# EAGLE board GameboyCartridgeKS_Modest (EAGLE 6.3)
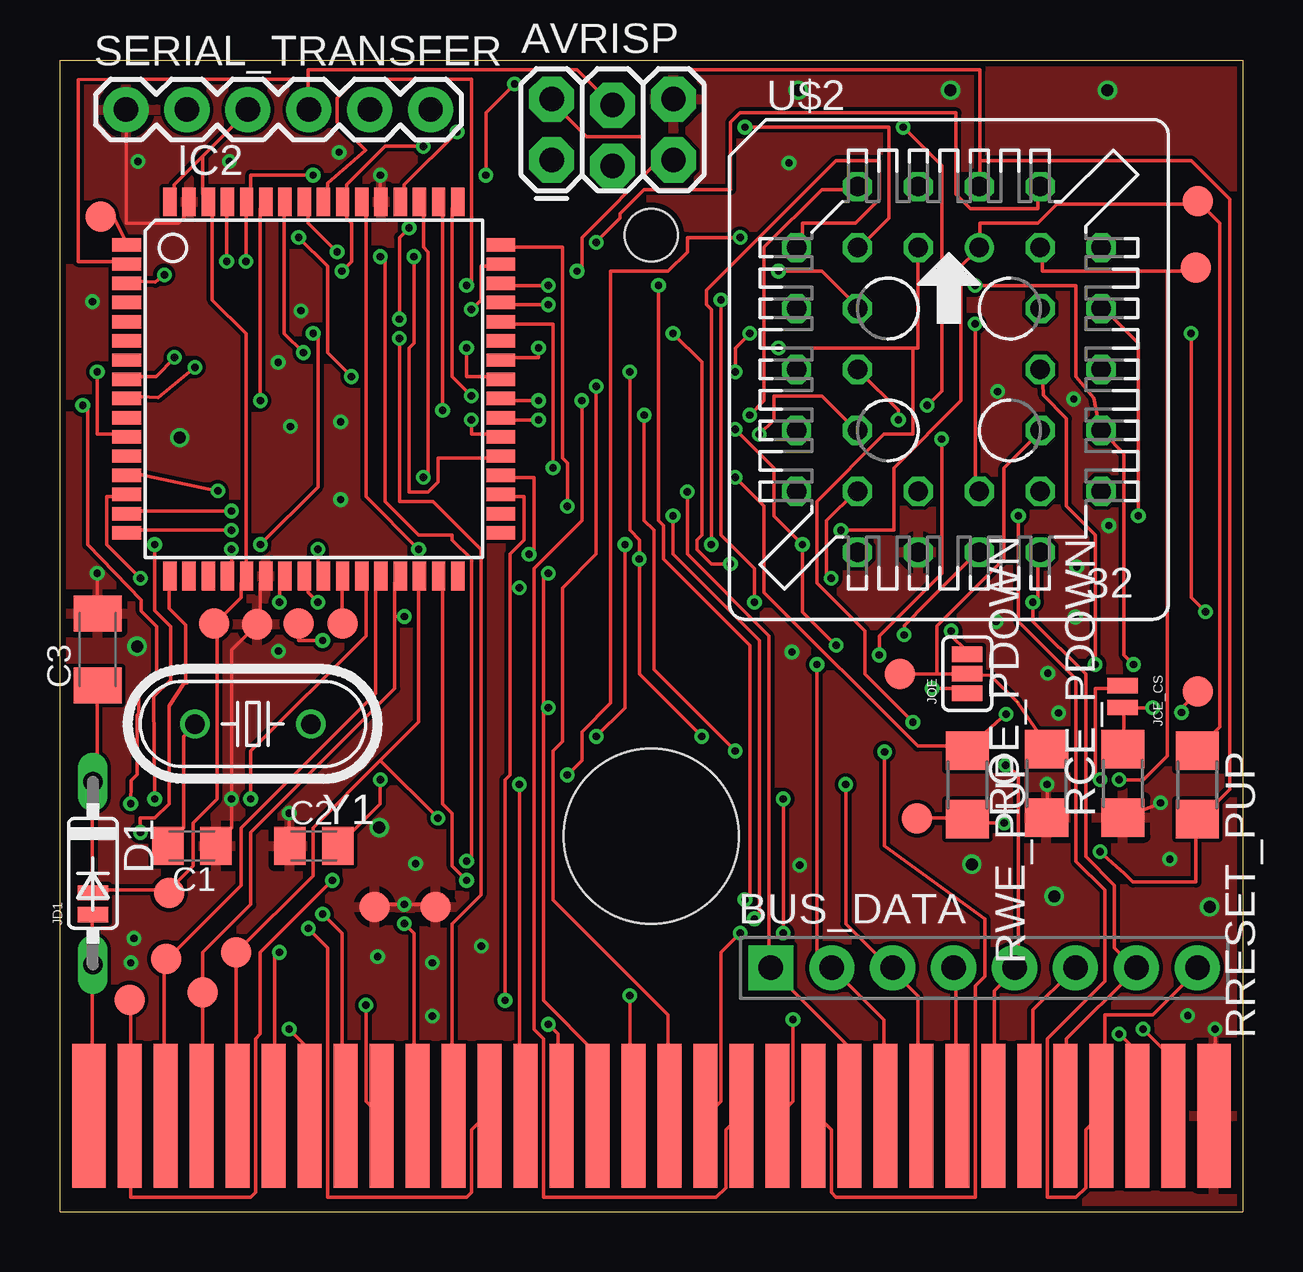
[diagram p0: board, top side]
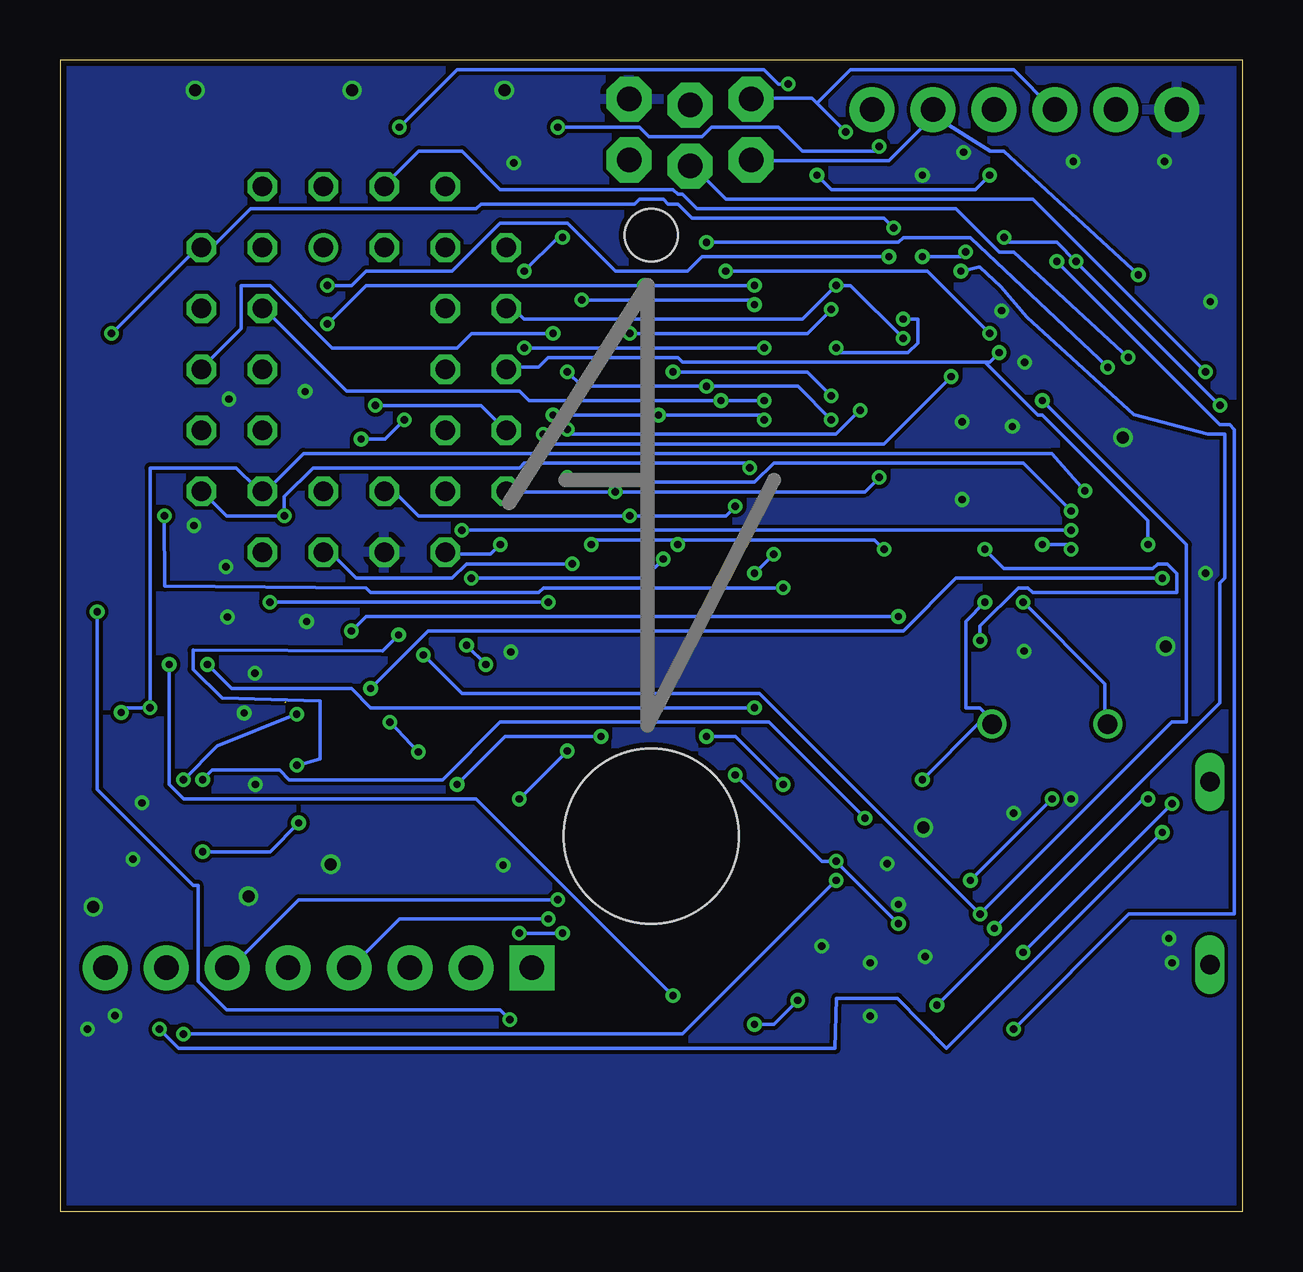
[diagram p1: board, bottom side, seen from below]

Size 49.3 x 48 mm. Coordinates in mm from the lower left corner, seen from the top.
Outline: 49.3,48 49.3,0 0,0 0,48 49.3,48
Copper layers (1*2*15*16): Top 0.035mm / dielectric 0.2mm / layer 2 0.0175mm / dielectric 1.1mm / layer 15 0.0175mm / dielectric 0.2mm / Bottom 0.035mm
Design rules "SeeedStudio_DRU_no_angle_20130527": minimum track width 6mil, minimum drill 12mil, track to track 6mil, track to pad 6mil, pad to pad 6mil, via to via 6mil, smd to smd 0mil, copper to edge 10mil, drill to drill 10mil, minimum pad ring 6mil, minimum via ring 6mil, stop-mask expansion 2mil, vias tented up to drill 25mil, thermal gap 10mil
Holes 7.3 mm at 24.65,15.65
Holes 2.2 mm at 24.65,40.7

## Footprints (pad centres in the part's own frame; a part is rotated, then mirrored left to right if it is on the bottom)
2X3_LOCK = drill 1.016 pad 1.88 octagon: 1 0,0; 2 0,2.54; 3 2.54,-0.254; 4 2.54,2.286; 5 5.08,0; 6 5.08,2.54
1X08_PIN1_NO_SILK = drill 1.016 pad 1.88 square: 1 0,0 | drill 1.016 pad 1.88: 2 2.54,0; 3 5.08,0; 4 7.62,0; 5 10.16,0; 6 12.7,0; 7 15.24,0; 8 17.78,0
C0805K = smd 1.3 x 1.6: 1 -1,0; 2 1,0
C1206K = smd 1.5 x 2: 1 -1.5,0; 2 1.5,0
DO35-7 = drill 0.813 long: A 3.81,0; C -3.81,0
TQFP64 = smd 1.194 x 0.559: 1 -7.8,6; 2 -7.8,5.2; 3 -7.8,4.4; 4 -7.8,3.6; 5 -7.8,2.8; 6 -7.8,2; 7 -7.8,1.2; 8 -7.8,0.4; 9 -7.8,-0.4; 10 -7.8,-1.2; 11 -7.8,-2; 12 -7.8,-2.8; 13 -7.8,-3.6; 14 -7.8,-4.4; 15 -7.8,-5.2; 16 -7.8,-6; 33 7.8,-6; 34 7.8,-5.2; 35 7.8,-4.4; 36 7.8,-3.6; 37 7.8,-2.8; 38 7.8,-2; 39 7.8,-1.2; 40 7.8,-0.4; 41 7.8,0.4; 42 7.8,1.2; 43 7.8,2; 44 7.8,2.8; 45 7.8,3.6; 46 7.8,4.4; 47 7.8,5.2; 48 7.8,6 | smd 0.559 x 1.194: 17 -6,-7.8; 18 -5.2,-7.8; 19 -4.4,-7.8; 20 -3.6,-7.8; 21 -2.8,-7.8; 22 -2,-7.8; 23 -1.2,-7.8; 24 -0.4,-7.8; 25 0.4,-7.8; 26 1.2,-7.8; 27 2,-7.8; 28 2.8,-7.8; 29 3.6,-7.8; 30 4.4,-7.8; 31 5.2,-7.8; 32 6,-7.8; 49 6,7.8; 50 5.2,7.8; 51 4.4,7.8; 52 3.6,7.8; 53 2.8,7.8; 54 2,7.8; 55 1.2,7.8; 56 0.4,7.8; 57 -0.4,7.8; 58 -1.2,7.8; 59 -2,7.8; 60 -2.8,7.8; 61 -3.6,7.8; 62 -4.4,7.8; 63 -5.2,7.8; 64 -6,7.8
PAD-JUMPER-2-NO_NO_SILK = smd 0.635 x 1.27: 1 -0.45,0; 2 0.45,0
PAD-JUMPER-3-NO_YES_SILK = smd 0.635 x 1.27: 1 -0.813,0; 2 0,0; 3 0.813,0
PAD.03X.05 = smd 1.27 x 1.27: P$1 0,0
R1206 = smd 1.6 x 1.803: 1 -1.422,0; 2 1.422,0
1X06 = drill 1.016 pad 1.88: 1 0,0; 2 2.54,0; 3 5.08,0; 4 7.62,0; 5 10.16,0; 6 12.7,0
CONNECTOR = smd 1.4 x 6: 1 0.7,-3; 32 47.6,-3 | smd 1 x 6: 2 2.4,-3; 3 3.9,-3; 4 5.4,-3; 5 6.9,-3; 6 8.4,-3; 7 9.9,-3; 8 11.4,-3; 9 12.9,-3; 10 14.4,-3; 11 15.9,-3; 12 17.4,-3; 13 18.9,-3; 14 20.4,-3; 15 21.9,-3; 16 23.4,-3; 17 24.9,-3; 18 26.4,-3; 19 27.9,-3; 20 29.4,-3; 21 30.9,-3; 22 32.4,-3; 23 33.9,-3; 24 35.4,-3; 25 36.9,-3; 26 38.4,-3; 27 39.9,-3; 28 41.4,-3; 29 42.9,-3; 30 44.4,-3; 31 45.9,-3
PLCC-S32 = drill 0.813: 1 1.27,5.08 | drill 0.813 octagon: 2 -1.27,7.62; 3 -1.27,5.08; 4 -3.81,7.62; 5 -6.35,5.08; 6 -3.81,5.08; 7 -6.35,2.54; 8 -3.81,2.54; 9 -6.35,0; 10 -3.81,0; 11 -6.35,-2.54; 12 -3.81,-2.54; 13 -6.35,-5.08; 14 -3.81,-7.62; 15 -3.81,-5.08; 16 -1.27,-7.62; 17 -1.27,-5.08; 18 1.27,-7.62; 19 1.27,-5.08; 20 3.81,-7.62; 21 6.35,-5.08; 22 3.81,-5.08; 23 6.35,-2.54; 24 3.81,-2.54; 25 6.35,0; 26 3.81,0; 27 6.35,2.54; 28 3.81,2.54; 29 6.35,5.08; 30 3.81,7.62; 31 3.81,5.08; 32 1.27,7.62
HC49U-V = drill 0.813: 1 -2.413,0; 2 2.413,0

## Placement (x,y rotation side)
AVRISP  AVR_SPI_PRG_62X3_LOCK  [2X3_LOCK]  20.49,43.83 0 top
BUS_DATA  [1X08_PIN1_NO_SILK]  29.63,10.16 0 top
C1  22pF  [C0805K]  5.5,15.24 180 top
C2  22pF  [C0805K]  10.58,15.24 0 top
C3  10uF  [C1206K]  1.56,23.43 90 top
D1  Germ.  [DO35-7]  1.37,14.1 270 top
IC2  MEGA64-A  [TQFP64]  10.58,34.29 0 top
JCE_CS  [PAD-JUMPER-2-NO_NO_SILK]  44.3,21.46 270 top
JD1  [PAD-JUMPER-2-NO_NO_SILK]  1.37,12.83 90 top
JOE  [PAD-JUMPER-3-NO_YES_SILK]  37.82,22.42 90 top
PEN  TEST-POINT3X5  [PAD.03X.05]  1.69,41.47 0 top
PEN1  TEST-POINT3X5  [PAD.03X.05]  13.12,12.7 0 top
PEN2  TEST-POINT3X5  [PAD.03X.05]  15.66,12.7 0 top
PEN3  TEST-POINT3X5  [PAD.03X.05]  4.55,13.27 0 top
PEN4  TEST-POINT3X5  [PAD.03X.05]  35.73,16.38 0 top
RCE_PDOWN  [R1206]  44.3,17.84 90 top
ROE_PDOWN  [R1206]  41.12,17.84 90 top
RRESET_PUP  [R1206]  47.41,17.78 270 top
RWE_PUP  [R1206]  37.82,17.78 270 top
SCL  [PAD.03X.05]  9.95,24.51 0 top
SCL1  [PAD.03X.05]  2.9,8.83 0 top
SCL2  [PAD.03X.05]  4.42,10.54 0 top
SCL3  [PAD.03X.05]  5.94,9.14 0 top
SCL4  [PAD.03X.05]  7.34,10.79 0 top
SDA  [PAD.03X.05]  11.79,24.51 0 top
SERIAL_TRANSFER  [1X06]  2.75,45.93 0 top
TP1  [PAD.03X.05]  47.43,21.67 0 top
TP2  [PAD.03X.05]  35,22.41 0 top
TP3  [PAD.03X.05]  47.34,39.34 0 top
TP4  [PAD.03X.05]  47.42,42.11 0 top
TP5  [PAD.03X.05]  6.42,24.5 0 top
TP6  [PAD.03X.05]  8.21,24.48 0 top
U$1  CONNECTOR  [CONNECTOR]  0.5,7 0 top
U$2  EN29F002T  [PLCC-S32]  37.05,35.1 0 top
U$3  [GAMEBOY_LOGO]  20.3,22.1 0 top
Y1  16MHz max  [HC49U-V]  8.04,20.32 180 top

## Library data of the parts
AVRISP BUS_DATA = SparkFun-Connectors
C1-C3 RCE_PDOWN ROE_PDOWN RRESET_PUP RWE_PUP = resistor
D1 = diode
IC2 = atmel; MPN: ATMEGA64-16AU; OC_FARNELL: 9171355; OC_NEWARK: 01M6899
JCE_CS JD1 JOE PEN PEN1-PEN4 SCL SCL1-SCL4 SDA TP1-TP6 = SparkFun-Passives
SERIAL_TRANSFER = SparkFun-Connectors; PROD_ID: CONN-08437
U$1 = gameboy
U$2 = kalshagar
U$3 = kalshagar-images
Y1 = SparkFun-FreqCtrl

## Nets
22: BUS_DATA.1 IC2.51 U$1.22 U$2.13
23: BUS_DATA.2 IC2.50 U$1.23 U$2.14
24: BUS_DATA.3 IC2.49 U$1.24 U$2.15
25: BUS_DATA.4 IC2.48 U$1.25 U$2.17
26: BUS_DATA.5 IC2.47 U$1.26 U$2.18
27: BUS_DATA.6 IC2.46 U$1.27 U$2.19
28: BUS_DATA.7 IC2.45 U$1.28 U$2.20
29: BUS_DATA.8 IC2.44 U$1.29 U$2.21
!CE: IC2.13 JCE_CS.2 RCE_PDOWN.2 TP1.P$1 U$2.22
!GB_CS: IC2.30 JCE_CS.1 SCL4.P$1 U$1.5
!GB_RD: IC2.29 JOE.3 SCL3.P$1 U$1.4
!GB_RESET: IC2.31 U$1.30
!GB_WR: IC2.28 SCL2.P$1 U$1.3
!OE: JOE.2 ROE_PDOWN.2 TP2.P$1 U$2.24
!RESET: IC2.16 RRESET_PUP.1 TP4.P$1 U$2.1
!WE: IC2.15 RWE_PUP.1 TP3.P$1 U$2.31
ADDRESS0: IC2.61 U$1.6 U$2.12
ADDRESS1: IC2.60 U$1.7 U$2.11
ADDRESS2: IC2.59 U$1.8 U$2.10
ADDRESS3: IC2.58 U$1.9 U$2.9
ADDRESS4: IC2.57 U$1.10 U$2.8
ADDRESS5: IC2.56 U$1.11 U$2.7
ADDRESS6: IC2.55 U$1.12 U$2.6
ADDRESS7: IC2.54 U$1.13 U$2.5
ADDRESS8: IC2.35 U$1.14 U$2.27
ADDRESS9: IC2.36 U$1.15 U$2.26
ADDRESS10: IC2.37 U$1.16 U$2.23
ADDRESS11: IC2.38 U$1.17 U$2.25
ADDRESS12: IC2.39 U$1.18 U$2.4
ADDRESS13: IC2.40 U$1.19 U$2.28
ADDRESS14: IC2.41 U$1.20 U$2.29
ADDRESS15: IC2.42 U$1.21 U$2.3
ADDRESS16: IC2.8 U$2.2
ADDRESS17: IC2.9 U$2.30
CTS: SERIAL_TRANSFER.2
DTR: SERIAL_TRANSFER.6
GB_CLOCK: IC2.27 SCL1.P$1 U$1.2
GB_MIC_IN: IC2.17 U$1.31
GND: AVRISP.6 C1.1 C2.1 C3.2 IC2.22 IC2.53 IC2.63 PEN1.P$1 PEN2.P$1 RCE_PDOWN.1 ROE_PDOWN.1 SERIAL_TRANSFER.1 TP6.P$1 U$1.32 U$2.16
MISO_TX: AVRISP.1 IC2.3 SERIAL_TRANSFER.5
MOSI_RX: AVRISP.4 IC2.2 SERIAL_TRANSFER.4
N$2: C1.2 IC2.23 Y1.2
N$3: AVRISP.5 IC2.20
N$4: C2.2 IC2.24 Y1.1
N$7: IC2.14 JOE.1
PEN: IC2.1 PEN.P$1
SCK: AVRISP.3 IC2.11
SCL: IC2.25 SCL.P$1
SDA: IC2.26 SDA.P$1
VCC: AVRISP.2 C3.1 D1.C IC2.21 IC2.52 IC2.62 IC2.64 JD1.2 PEN3.P$1 PEN4.P$1 RRESET_PUP.2 RWE_PUP.2 SERIAL_TRANSFER.3 TP5.P$1 U$2.32
VDD: D1.A JD1.1 U$1.1

## Tracks (layer width: path | path; a pad name or v marks a point on that pad's centre or on a via)
22  (via drill 0.3)
  Top 0.152: 32.85,4 U$1.22 32.75,4 32.75,7 29.75,10 BUS_DATA.1 29.55,10.2 29.55,24 26.15,27.4 v26.15,30 | v15.15,30.6 15.35,30.8 15.35,40 15.15,40.2 15.15,42 IC2.51
  Bottom 0.152: v15.15,30.6 15.75,30 v26.15,30 30.55,30 U$2.13
23  (via drill 0.3)
  Top 0.152: U$1.23 34.35,4 34.35,8 32.35,10 BUS_DATA.2 32.15,10.2 31.55,10.8 v31.55,22.8 | v15.95,33.4 15.95,42 IC2.50 | v28.15,32.6 29.75,31 29.75,29 v30.95,27.8 30.95,25 v32.35,23.6
  Bottom 0.152: v15.95,33.4 16.95,32.4 27.95,32.4 v28.15,32.6 | v30.95,27.8 31.35,27.4 33.15,27.4 U$2.14 | v32.35,23.6 v31.55,22.8
24  (via drill 0.3)
  Top 0.152: U$1.24 35.75,4 35.75,9 34.75,10 BUS_DATA.3 34.55,10.2 32.75,12 v32.75,17.8 | v17.15,34 16.35,34.8 16.35,41.8 16.55,42 IC2.49 | v23.75,35 23.75,28.4 24.15,28 v24.15,27.2 24.15,22.4 v26.75,19.8 | v32.15,26.4 31.95,26.6 31.95,28.8 33.15,30 U$2.15
  Bottom 0.152: v17.15,34 18.15,35 v23.75,35 | v24.15,27.2 24.95,26.4 v32.15,26.4 | v32.75,17.8 30.75,19.8 v26.75,19.8
25  (via drill 0.3)
  Top 0.152: BUS_DATA.4 37.35,10 37.35,4 U$1.25 | v21.15,29.4 21.15,31.2 20.95,31.4 20.95,40.2 18.55,40.2 IC2.48 | v28.95,12.2 29.15,12.4 29.15,23.8 25.55,27.4 v25.55,29
  Bottom 0.152: v21.15,29.4 21.55,29 v25.55,29 34.35,29 35.35,30 35.75,30 U$2.17 | v28.95,12.2 35.15,12.2 37.15,10.2 BUS_DATA.4
26  (via drill 0.3)
  Top 0.152: U$1.26 38.95,4 38.95,9.2 39.75,10 BUS_DATA.5 39.95,10.2 39.95,18.2 v39.42,18.6 | v17.15,37.6 17.55,38 17.55,39.4 18.35,39.4 IC2.47 | v25.55,36.6 26.75,35.4 26.75,28.2 26.55,28 26.55,27.6 27.15,27 v27.95,27 | v35.19,24.04 35.2,24.43 36.15,25.4 38.15,27.4 U$2.18
  Bottom 0.152: v17.15,37.6 18.15,36.6 v25.55,36.6 | v27.95,27 32.35,27 32.95,26.4 36.95,26.4 37.95,27.4 38.15,27.4 U$2.18 | v39.42,18.6 38.45,18.87 38.45,21.27 42.55,21.4 43.75,22.6 43.75,23.4 35.85,23.37 v35.19,24.04
27  (via drill 0.3)
  Top 0.152: BUS_DATA.6 42.15,10 40.55,8.4 40.55,4 U$1.27 | v20.35,38.6 18.55,38.6 IC2.46 | v38.15,37 38.15,30.2 U$2.19 | v28.55,13 28.75,13.2 28.75,23.6 25.15,27.2 25.15,28.6 24.95,28.8 v24.95,38.6
  Bottom 0.152: v20.35,38.6 v24.95,38.6 36.55,38.6 v38.15,37 | v28.55,13 39.35,13 42.15,10.2 BUS_DATA.6
28  (via drill 0.3)
  Top 0.152: U$1.28 41.95,4 41.95,7.2 44.75,10 BUS_DATA.7 44.75,10.2 43.95,11 43.95,13.6 42.75,14.8 42.75,22.4 40.55,24.6 v40.55,25.4 40.75,25.6 40.75,27.4 U$2.20 | v20.35,37.8 18.55,37.8 IC2.45 | v27.55,38 27.55,28.2 28.95,26.8 v28.95,25.4
  Bottom 0.152: v20.35,37.8 20.55,38 v27.55,38 | v40.55,25.4 v28.95,25.4
29  (via drill 0.3)
  Top 0.152: BUS_DATA.8 47.35,10 45.55,8.2 43.55,8.2 43.55,4 U$1.29 43.35,4 42.75,3.4 42.75,1 42.35,0.6 41.15,0.6 41.15,7.2 43.55,9.6 43.55,13.4 42.35,14.6 42.35,22.2 39.95,24.6 v39.95,29 | v20.55,31 20.55,37 18.55,37 IC2.44
  Bottom 0.152: v20.55,31 20.75,31.2 29.95,31.2 30.15,31 38.75,31 39.95,29.8 v39.95,29 42.35,29 43.35,30 U$2.21
!CE  (via drill 0.3)
  Top 0.152: 44.35,21 44.35,19.4 RCE_PDOWN.2 | v46.75,20.8 46.75,21 47.35,21.6 TP1.P$1 | 44.35,21 v45.55,21 | 44.35,21 JCE_CS.2 | v6.58,30.04 2.95,30.8 IC2.13
  Bottom 0.152: v46.75,20.8 46.55,21 v45.55,21 45.55,31 41.95,31 41.15,30.2 40.95,30.2 U$2.22 40.75,30.2 40.55,30.2 39.15,31.6 7.95,31.6 v6.58,30.04
!GB_CS  (via drill 0.3)
  Top 0.152: 13.35,18.8 10.55,16 10.55,14 SCL4.P$1 7.35,10.6 7.35,4 U$1.5 | 13.35,18.8 14.95,20.4 14.95,26.4 IC2.30 | v43.35,18 43.15,18.2 43.15,21.8 44.15,21.8 JCE_CS.1 | 13.35,18.8 v15.75,16.4
  Bottom 0.152: v43.35,18 42.95,18.4 40.15,18.4 39.75,18 33.35,18 30.95,20.4 19.75,20.4 v15.75,16.4
!GB_RD  (via drill 0.3)
  Top 0.152: 13.95,24.8 13.95,21.8 7.95,15.8 7.95,12.8 5.95,10.8 5.95,9.2 SCL3.P$1 5.95,9 5.95,4 U$1.4 | 13.95,24.8 13.95,26.2 14.15,26.4 IC2.29 | v37.15,24.2 37.15,24 37.75,23.4 JOE.3 | 13.95,24.8 v14.35,24.8
  Bottom 0.152: v37.15,24.2 36.55,24.8 v14.35,24.8
!GB_RESET  (via drill 0.3)
  Top 0.152: v16.95,13.8 16.35,14.4 16.35,16.6 15.95,17 15.95,26.4 IC2.31 | v44.15,7.4 44.75,6.8 44.75,4 U$1.30
  Bottom 0.152: v16.95,13.8 23.35,7.4 v44.15,7.4
!GB_WR
  Top 0.152: IC2.28 13.35,26.4 13.15,26.2 13.15,21.6 7.55,16 7.55,13.6 4.55,10.6 SCL2.P$1 4.35,10.4 4.35,4 U$1.3
!OE  (1 unrouted)
  Top 0.152: 36.55,22.4 37.75,22.4 JOE.2 | 36.55,22.4 35.15,22.4 TP2.P$1 | 39.88,21.25 41.15,19.4 ROE_PDOWN.2 | 37.95,22.4 JOE.2 | 36.55,22.4 36.55,24.4 39.35,27.2 39.35,31 40.75,32.4 U$2.24 | JOE.2 38.77,22.35 39.92,21.21
!RESET  (via drill 0.3)
  Top 0.152: v7.15,28.4 2.95,28.4 IC2.16 | v32.55,28.4 34.75,28.4 34.75,31 37.55,33.8 37.55,39.4 38.15,40 U$2.1 38.35,40.2 38.35,41.2 40.75,41.2 41.55,42 47.35,42 TP4.P$1 47.55,42 48.35,41.2 48.35,20.2 47.55,19.4 RRESET_PUP.1
  Bottom 0.152: v32.55,28.4 v7.15,28.4
!WE  (via drill 0.3)
  Top 0.152: 46.15,39.2 40.95,39.2 40.95,40 U$2.31 | 46.15,39.2 47.15,39.2 TP3.P$1 | v7.15,29.2 2.95,29.2 IC2.15 | v28.15,30.6 29.35,29.4 29.35,25.8 35.75,19.4 37.75,19.4 RWE_PUP.1 37.95,19.4 v39.43,20.73 | 46.15,39.2 46.15,19 45.15,18 v44.15,18
  Bottom 0.152: v7.15,29.2 9.15,31.2 19.55,31.2 20.35,30.4 25.75,30.4 25.95,30.6 v28.15,30.6 | v44.15,18 42.75,19.4 v39.43,20.73
ADDRESS0  (via drill 0.3)
  Top 0.152: v6.95,39.6 6.95,42 IC2.61 | v0.95,33.6 1.15,33.4 1.15,27.8 3.4,25.49 3.4,25.03 4.04,24.38 4.04,22.42 3.28,21.65 3.28,20.77 3.21,20.7 3.21,18.22 2.96,17.97 2.96,17.91 v2.95,17 | v9.15,10.8 8.95,10.6 8.95,4 U$1.6 | v29.15,32.4 29.75,33 29.75,34 31.75,34 33.15,32.6 U$2.12 | v12.15,34.8 11.15,35.8 11.15,39.4 v9.95,40.6
  Bottom 0.152: v0.95,33.6 v6.95,39.6 7.75,40.4 9.75,40.4 v9.95,40.6 | v9.15,10.8 v2.95,17 | v29.15,32.4 28.75,32 14.95,32 v12.15,34.8
ADDRESS1  (via drill 0.3)
  Top 0.152: v7.75,39.6 7.75,42 IC2.60 7.95,42.2 7.95,43.2 v10.55,43.2 | v9.55,7.6 10.35,6.8 10.35,4 U$1.7 | v36.15,33.6 36.75,34.2 36.75,43.6 v35.15,45.2 | v18.95,47 17.75,45.8 v17.75,43.2
  Bottom 0.152: v7.75,39.6 0.95,32.8 0.55,32.8 0.35,32.6 0.35,12.4 4.75,12.4 v9.55,7.6 | v36.15,33.6 31.75,33.6 30.75,32.6 U$2.11 | v35.15,45.2 32.75,47.6 19.95,47.6 19.35,47 v18.95,47 | v17.75,43.2 17.15,42.6 11.15,42.6 v10.55,43.2
ADDRESS2  (via drill 0.3)
  Top 0.152: v8.35,33.8 8.35,41.8 8.55,42 IC2.59 | v10.95,12.4 11.75,11.6 11.75,4 U$1.8 | v34.95,33 34.95,33.4 33.35,35 U$2.10 | v36.75,32.2 36.75,26.6 34.15,24 v34.15,23.2
  Bottom 0.152: v8.35,33.8 2.35,27.8 2.35,20.4 2.95,20.4 v10.95,12.4 20.15,21.6 32.55,21.6 v34.15,23.2 | v34.95,33 35.75,32.2 v36.75,32.2
ADDRESS3  (via drill 0.3)
  Top 0.152: v10.15,35.8 9.35,36.6 9.35,42 IC2.58 | v12.75,8.6 12.75,4.6 13.35,4 U$1.9 | v3.95,27.8 3.95,25.05 4.61,24.38 4.61,22.16 3.91,21.46 v3.95,17.2
  Bottom 0.152: v10.15,35.8 10.55,35.4 10.75,35.4 | 10.75,35.4 23.35,35.4 23.55,35.6 28.95,35.6 29.35,35.2 30.55,35.2 U$2.9 | v12.75,8.6 4.15,17.2 v3.95,17.2 | v3.95,27.8 3.95,28.8 8.35,33.2 8.55,33.2 10.75,35.4
ADDRESS4  (via drill 0.3)
  Top 0.152: v11.55,40 10.35,41.2 10.35,42 IC2.57 | v13.35,39.8 13.55,39.6 13.55,29.6 14.95,28.2 16.35,28.2 16.35,28 17.15,27.2 17.15,14.8 v16.95,14.6 | v14.35,12 14.75,11.6 14.75,4 U$1.10 | v29.95,39.2 31.75,39.2 33.15,37.8 U$2.8 | v28.35,40.6 26.15,40.6 26.15,40 25.35,39.2 22.95,39.2 22.95,21.2 21.75,20 21.75,18.8 v21.15,18.2
  Bottom 0.152: v11.55,40 11.75,39.8 v13.35,39.8 | v14.35,12 v16.95,14.6 17.55,14.6 v21.15,18.2 | v29.95,39.2 28.55,40.6 v28.35,40.6
ADDRESS5  (via drill 0.3)
  Top 0.152: 16.45,4 U$1.11 16.35,4 16.35,12 17.55,13.2 17.55,27.6 15.55,29.6 14.15,29.6 v14.15,36.4 | v16.95,38.6 17.15,38.8 17.15,47.2 12.35,47.2 11.55,46.4 11.55,45.4 12.74,44.24 11.15,42.86 11.15,42.8 11.15,42.2 IC2.56
  Bottom 0.152: U$2.7 30.55,37.6 30.35,37.6 29.95,37.2 18.35,37.2 v16.95,38.6 16.35,38.6 v14.15,36.4
ADDRESS6  (via drill 0.3)
  Top 0.152: v15.15,44.4 13.55,44.4 11.95,42.8 11.95,42.2 IC2.55 11.95,42 11.95,41.4 12.15,41.2 12.15,39.6 v11.75,39.2 | v28.55,45.2 34.55,45.2 34.55,41.4 33.35,40.2 U$2.6 | v10.35,11.8 11.15,11 11.15,0.6 16.95,0.6 17.15,0.8 17.15,3.4 17.75,4 U$1.12
  Bottom 0.152: v15.15,44.4 15.35,44.2 18.35,44.2 19.35,45.2 22.15,45.2 22.55,44.8 24.75,44.8 25.15,45.2 v28.55,45.2 | v10.35,11.8 0.95,21.2 0.95,26.2 0.75,26.4 0.75,32.4 1.46,32.4 4.55,33.21 8.99,37.27 10.07,38.54 10.96,39.37 11.02,39.37 11.68,39.2 v11.75,39.2
ADDRESS7  (via drill 0.3)
  Top 0.152: v14.95,27.6 12.75,29.8 12.75,42 IC2.54 | v27.15,27.8 27.15,37.6 26.95,37.8 26.95,38.4 32.35,43.8 34.15,43.8 34.15,42.2 33.15,41.2 30.95,41.2 30.95,40.4 30.75,40.2 U$2.5 | v19.15,17.8 19.15,4.2 19.35,4 U$1.13 | v22.35,19.8 23.55,21 v23.55,27.8
  Bottom 0.152: v14.95,27.6 15.35,28 23.55,28 | 23.55,28 26.95,28 v27.15,27.8 | v19.15,17.8 21.15,19.8 v22.35,19.8 | 23.55,28 v23.55,27.8
ADDRESS8  (via drill 0.3)
  Top 0.152: 18.75,26 18.75,18.2 18.55,18 v18.55,8.8 | 18.75,26 18.75,27.4 19.35,28 19.35,29.8 18.55,29.8 IC2.35 | v20.35,7.8 20.75,7.4 20.75,4 U$1.14 | v44.95,29 44.95,36.2 43.55,37.6 U$2.27 | 18.75,26 v19.15,26
  Bottom 0.152: v18.55,8.8 19.55,7.8 v20.35,7.8 | v44.95,29 44.93,26.06 36.55,26 36.35,25.8 29.35,25.8 29.15,26 v19.15,26
ADDRESS9  (via drill 0.3)
  Top 0.152: v19.55,27.4 19.75,27.6 19.75,30.6 18.55,30.6 IC2.36 | v20.35,26.6 20.15,26.4 20.15,21 | 20.15,21 20.15,8.8 22.35,6.6 22.35,4 U$1.15 | v43.15,22.8 43.15,28.2 41.95,29.4 41.95,33.05 41,34.04 40.95,35 U$2.26 | 20.15,21 v20.35,21
  Bottom 0.152: v20.35,26.6 v19.55,27.4 | v43.15,22.8 42.15,21.8 37.15,21.8 36.35,21 v20.35,21
ADDRESS10  (via drill 0.3)
  Top 0.152: v14.75,39.8 14.75,36.2 14.55,36 14.55,30 15.35,30 15.75,30.4 15.75,31.4 18.35,31.4 IC2.37 | v38.15,38.6 42.35,38.6 42.35,34.81 43.09,33.91 43.35,32.6 U$2.23 43.55,32.4 44.35,31.6 44.35,23.2 v44.75,22.8 | v23.75,9 23.75,4 U$1.16
  Bottom 0.152: v14.75,39.8 22.55,39.8 23.15,39.2 26.15,39.2 28.15,41.2 30.95,41.2 32.95,39.2 36.55,39.2 37.15,38.6 v38.15,38.6 | v23.75,9 31.95,17.2 44.15,17.2 44.75,17.8 v44.75,22.8
ADDRESS11  (via drill 0.3)
  Top 0.152: v17.15,33 17.15,32.4 18.35,32.4 IC2.38 | v22.35,34.4 22.35,27.4 20.95,26 20.95,19.6 20.55,19.2 20.55,13 25.35,8.2 25.35,4 U$1.17 | v28.75,36.6 28.15,36 v28.15,35
  Bottom 0.152: v17.15,33 18.55,34.4 v22.35,34.4 27.55,34.4 v28.15,35 | v28.75,36.6 32.15,36.6 32.75,36 37.95,36 40.55,38.6 41.75,38.6 41.75,36.8 43.35,35.2 U$2.25
ADDRESS12  (via drill 0.3)
  Top 0.152: v19.95,33 18.55,33 IC2.39 | v28.75,33.2 29.35,33.8 29.35,40.2 31.75,42.6 33.15,42.6 U$2.4 | v28.35,11.6 27.55,10.8 27.55,4.6 26.95,4 U$1.18 | v30.15,17.2 v30.15,11.6 | v28.15,19.2 24.75,22.6 24.75,28.4 24.35,28.8 v24.35,33.2
  Bottom 0.152: v19.95,33 20.15,33.2 v24.35,33.2 v28.75,33.2 | v30.15,11.6 v28.35,11.6 | v28.15,19.2 v30.15,17.2
ADDRESS13  (via drill 0.3)
  Top 0.152: v19.95,33.8 18.55,33.8 IC2.40 | v21.75,33.8 21.75,28.8 19.75,26.8 19.75,7.6 20.15,7.2 20.15,0.6 27.35,0.6 27.75,1 27.75,3.4 28.35,4 U$1.19
  Bottom 0.152: v19.95,33.8 v21.75,33.8 29.75,33.8 30.15,34.2 37.35,34.2 40.75,37.6 U$2.28
ADDRESS14  (via drill 0.3)
  Top 0.152: v16.95,36 16.95,34.8 18.35,34.8 IC2.41 | v14.15,37.2 14.15,40.6 v14.55,41 | v30.55,8 30.55,4.6 29.95,4 U$1.20 | v47.75,25 47.15,25.6 v47.15,36.6
  Bottom 0.152: v16.95,36 16.75,35.8 13.95,35.8 13.55,36.2 13.55,37.2 v14.15,37.2 | v14.55,41 14.95,41.4 22.95,41.4 23.55,42 23.95,42 24.15,42.2 25.15,42.2 25.35,42 31.75,42 31.95,41.8 41.35,41.8 42.95,40.2 43.35,40.2 U$2.29 43.55,40 43.75,40 v47.15,36.6 | v30.55,8 30.95,8.4 42.35,8.4 43.55,9.6 43.55,13.6 43.75,13.6 47.75,17.6 v47.75,25
ADDRESS15  (via drill 0.3)
  Top 0.152: v19.95,36 19.95,35.6 18.55,35.6 IC2.42 | 35.55,36 35.75,36 35.75,40 U$2.3 | 35.55,36 v29.95,36 | v34.37,19.16 34.37,15.24 38.55,12.2 38.55,9.8 38.15,9.4 38.15,0.6 32.35,0.6 32.15,0.8 32.15,3.4 31.55,4 U$1.21 | v35.55,20.4 33.55,22.4 33.55,24.2 31.55,26.2 31.55,29.6 34.35,32.4 35.55,32.4 35.55,36
  Bottom 0.152: v29.95,36 v19.95,36 | v35.55,20.4 v34.37,19.16
ADDRESS16  (via drill 0.3)
  Top 0.152: v4.77,35.6 4.01,34.8 2.95,34.8 IC2.8
  Bottom 0.152: v4.77,35.6 9.55,40 10.15,40 11.95,41.8 22.75,41.8 23.35,42.4 23.55,42.4 23.75,42.6 30.95,42.6 32.55,44.2 34.35,44.2 35.75,42.8 U$2.2
ADDRESS17  (via drill 0.3)
  Top 0.152: v5.63,35.19 4.1,33.94 2.95,34 IC2.9 | v22.35,40.4 23.35,41.4 23.35,41.6 24.35,42.6 27.95,42.6 27.95,45.4 28.35,45.8 37.35,45.8 37.35,42.4 37.95,41.8 40.75,41.8 40.75,42.6 U$2.30
  Bottom 0.152: v5.63,35.19 11.35,40.6 14.15,40.6 14.35,40.4 v22.35,40.4
GB_CLOCK  (via drill 0.3)
  Top 0.152: v7.95,17.2 7.95,19.2 12.75,24 12.75,26.4 IC2.27 | v11.35,13.8 8.35,10.8 8.35,7.4 8.15,7.2 8.15,0.8 7.95,0.6 2.95,0.6 2.95,4 | 2.95,4 2.95,8.8 SCL1.P$1 | 2.95,4 U$1.2
  Bottom 0.152: v11.35,13.8 v7.95,17.2
GB_MIC_IN  (via drill 0.3)
  Top 0.152: 5.25,22.04 5.18,22.04 4.55,21.08 4.55,17 3.95,16.4 3.35,16.4 v3.35,15.8 | 5.31,22.04 5.25,22.04 | 5.25,22.04 5.25,24.45 4.55,25.14 4.55,26.4 IC2.17 | v45.15,7.6 46.35,6.4 46.35,4 U$1.31
  Bottom 0.152: v3.35,15.8 12.35,6.8 14.39,8.89 16.93,8.89 16.99,6.79 44.35,6.8 v45.15,7.6
GND  (via drill 0.3, 0.5)
  Top 0.152: 8.55,26.6 IC2.22 8.55,26.4 8.35,26.2 8.35,24.6 TP6.P$1 8.15,24.4 7.15,23.4 v7.15,17.2 7.15,16 6.55,15.4 C1.1 | PEN1.P$1 13.15,12.8 v14.35,12.8 15.55,12.8 PEN2.P$1 | 5.35,42.2 IC2.63 5.35,42 5.15,41.8 5.15,41.4 4.95,41.2 2.75,41.2 SERIAL_TRANSFER.1 | v13.35,43.2 13.35,42.2 IC2.53 | v9.55,16.6 9.55,15.4 C2.1 | v41.15,17.8 41.15,16.6 ROE_PDOWN.1 | v45.88,17.04 44.35,16.4 RCE_PDOWN.1 | v1.55,26.6 1.55,25.4 C3.2 | v48.15,7.6 48.15,4 U$1.32
  other vias: 13.31,16 3.21,23.56 4.99,32.26 30.77,46.74 37.12,46.74 43.66,46.74 47.92,12.7 41.44,13.14 38.01,14.48 46.26,14.69 7.06,43.77 3.25,43.77 1.35,37.93 9.1,35.39 9.6,32.72 11.7,32.91 11.7,29.67 10.05,37.55 11.64,44.15 39.08,34.18 30.38,43.7 42.38,26.88 42.32,24.78 39.02,24.59 41.18,22.43 41.62,20.78 43.72,28.59 42.26,33.86 3.08,11.38 2.95,10.37 15.52,8.14 15.52,10.37 13.24,10.62 17.56,11.07 14.83,14.49 30.83,14.43 30.51,23.32 9.11,23.36 47.01,8.17
  pour Bottom: -0.85,49.53 51.22,49.53 51.22,-1.27 -0.85,-1.27
  pour Top: -7.2,49.53 57.57,49.53 57.57,-7.62 -7.2,-7.62
MISO_TX  (via drill 0.3)
  Top 0.152: v4.35,39.05 3.97,38.74 2.95,38.8 IC2.3
  Bottom 0.152: v4.35,39.05 9.95,44.2 10.52,44.2 12.75,45.6 | 12.75,45.6 12.95,45.8 SERIAL_TRANSFER.5 12.75,45.6 | 12.75,45.6 12.95,45.6 14.75,43.8 20.35,43.8 AVRISP.1
MOSI_RX
  Top 0.152: 10.35,47.2 2.35,47.2 0.75,47.19 0.75,39.6 2.75,39.6 IC2.2 | 10.35,47.2 10.35,46 SERIAL_TRANSFER.4 | 10.35,47.2 10.35,47.6 21.55,47.6 22.95,46.2 AVRISP.4
N$2  (via drill 0.3)
  Top 0.152: v9.15,25.4 9.15,26.2 9.35,26.4 IC2.23 | C1.2 4.55,15.4 5.15,16 5.15,19.8 5.55,20.2 Y1.2
  Bottom 0.152: v9.15,25.4 5.75,22 5.75,20.4 Y1.2
N$3  (via drill 0.3)
  Top 0.152: v7.15,27.6 7.15,26.6 IC2.20 | v8.35,27.8 10.75,30.2 10.75,36.4 v10.55,36.6 | v21.55,39.2 21.75,39.4 21.75,40.6 24.95,43.8 25.55,43.8 AVRISP.5
  Bottom 0.152: v7.15,27.6 7.35,27.8 v8.35,27.8 | v10.55,36.6 13.15,39.2 v21.55,39.2
N$4  (via drill 0.3)
  Top 0.152: v10.75,25.4 10.35,25.8 10.35,26.4 IC2.24 | v13.35,18 13.35,17 11.75,15.4 C2.2
  Bottom 0.152: v10.75,25.4 11.55,24.6 11.55,21 10.95,21 10.35,20.4 Y1.1 10.55,20.4 10.95,20.4 v13.35,18
N$7  (via drill 0.3)
  Top 0.152: v3.35,26.4 1.95,27.8 1.95,29.8 2.75,29.8 IC2.14 | v36.35,21.8 37.75,21.8 JOE.1
  Bottom 0.152: v3.35,26.4 11.95,26.4 14.15,24.2 33.95,24.2 v36.35,21.8
PEN
  Top 0.152: IC2.1 2.75,40.4 2.13,41.65 1.81,41.54 PEN.P$1
SCK  (via drill 0.3)
  Top 0.152: v1.55,35 1.55,32.4 2.75,32.4 IC2.11
  Bottom 0.152: v1.55,35 8.75,42.2 21.55,42.2 22.75,43.4 22.95,43.4 AVRISP.3
SCL  (via drill 0.3)
  Top 0.152: v10.75,27.6 10.75,26.8 10.95,26.6 IC2.25 | v10.95,23.8 9.95,23.8 9.95,24.4 SCL.P$1
  Bottom 0.152: v10.75,27.6 9.95,26.8 3.75,26.8 3.55,27 3.15,27 2.75,26.6 2.75,25.8 8.75,25.8 8.95,26 9.35,26 10.95,24.4 v10.95,23.8
SDA
  Top 0.152: IC2.26 11.75,26.4 11.75,24.6 SDA.P$1
VCC  (via drill 0.3)
  Top 0.152: 5.95,44 7.75,45.8 SERIAL_TRANSFER.3 | 5.95,44 4.75,42.8 4.75,42.2 IC2.64 | 5.95,44 5.95,42.4 6.15,42.2 IC2.62 6.35,42 6.35,38 7.75,36.6 7.75,26.6 IC2.21 7.75,26.4 7.55,26.2 7.55,25.6 6.55,24.6 TP5.P$1 6.55,24.4 6.55,17.2 5.55,16.2 5.55,14.4 4.55,13.4 PEN3.P$1 4.35,13.4 1.55,13.4 JD1.2 1.35,13.4 1.35,17.8 D1.C 1.55,18 1.55,22.2 C3.1 | v16.55,45 14.35,42.8 14.35,42.2 IC2.52 | PEN4.P$1 35.75,16.4 37.75,16.4 RWE_PUP.2 37.95,16.2 v39.35,16.2 | 38.35,43.8 47.15,43.8 48.75,42.2 48.75,17.6 47.55,16.4 RRESET_PUP.2 47.35,16.2 47.35,13.73 44.73,13.73 44.36,14.1 v43.35,15 | 38.35,43.8 38.35,42.8 U$2.32 | 38.35,43.8 38.35,47.6 24.95,47.6 24.35,47 24.35,44.8 21.95,44.8 20.55,46.2 AVRISP.2
  Bottom 0.152: 17.75,46.2 17.95,46.4 20.35,46.4 AVRISP.2 | 17.75,46.2 v16.55,45 | v39.35,16.2 40.55,15 v43.35,15 | 17.75,46.2 16.35,47.6 9.55,47.6 7.95,46 SERIAL_TRANSFER.3
VDD
  Top 0.152: JD1.1 1.35,12.2 1.35,10.4 D1.A 1.35,10.2 1.35,4 U$1.1

## Text on the board
tDocu: GND | VCC | RX | TX | EN29F002T | !RST | PEN | !WE | ATmega64a | VCC | SDA | 10uF | GND | SCL | JOE | !OE!=!RD! | !CE | !OE | !OE!=B4 | !CE!=!CS! | 16 MHz MAX | 22pF | 22pF | VCC | VCC | VCC | !WE!up | !OE!dn | !CE!dn | !RST!up | !CS | !WR | !WR | GND | GND | !RD | Data bus | CLK
bDocu: Gameboy cartridge "Modest edition" | http://kalshagar.wikispaces.com/Gameboy+homebrew+cartridge | Version 1.0 - Jan2015